# Altium PCB mach_relay_dao_chieu.PcbDoc
Units mil, origin at the board's own origin, x right, y up, seen from the top; angles counter-clockwise.
Board outline 4230 x 1740 mil, 2 copper layers (Top Layer, Bottom Layer); 21 components, 18 nets, 55 pads, 0 vias.
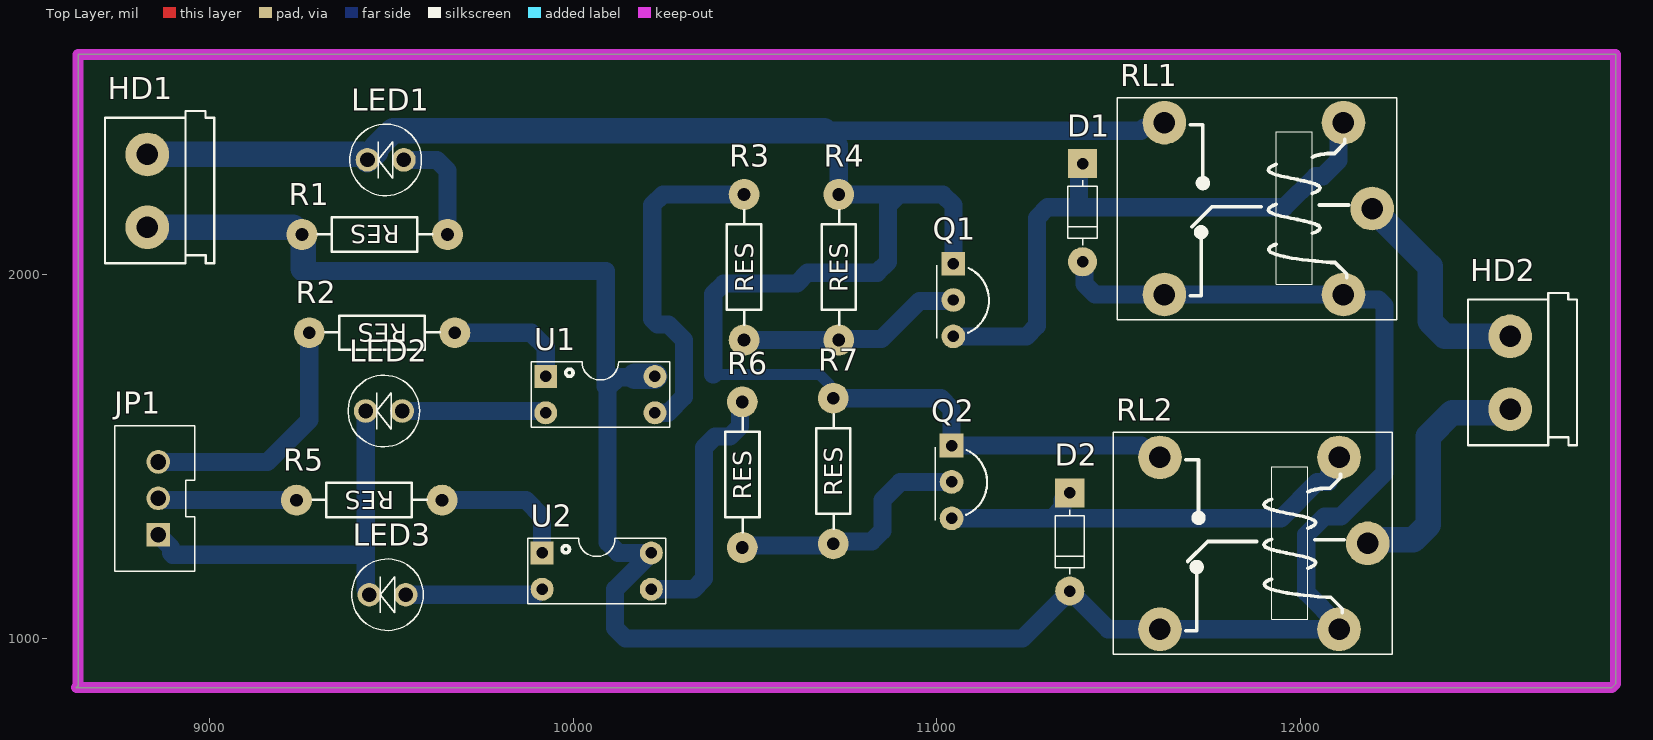
[diagram p0: Top Layer view]
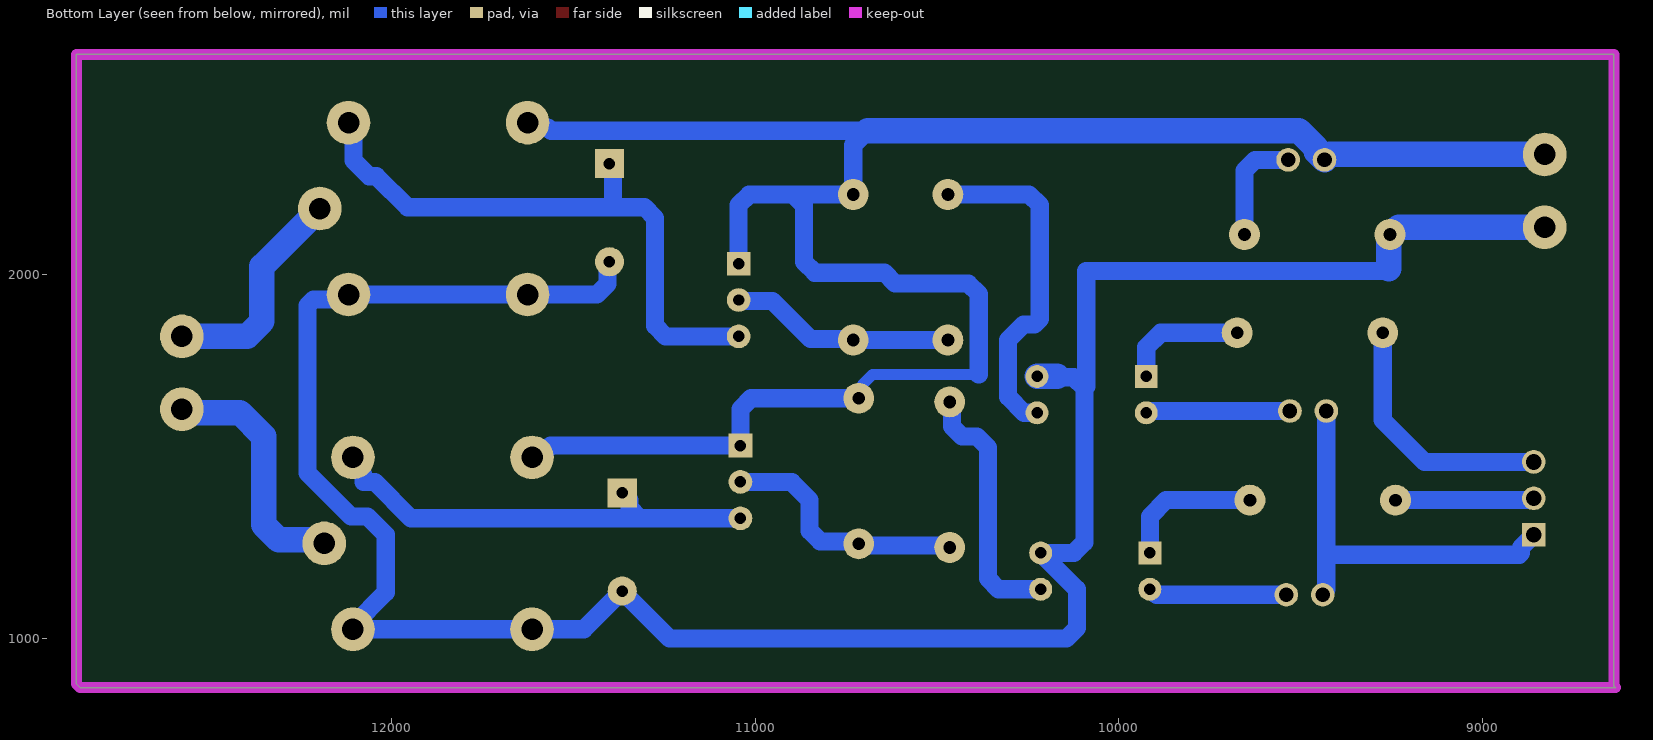
[diagram p1: Bottom Layer view, seen from below]

## Layer stack, top to bottom
Top Solder: solder mask 0.4, Solder Resist, Dk 3.5
Top Layer: signal copper 1.4
Dielectric 1: dielectric 12.6, FR-4, Dk 4.8
Bottom Layer: signal copper 1.4
Bottom Solder: solder mask 0.4, Solder Resist, Dk 3.5

## Board outline
8635,865 8640,870 8640,2605 12865,2605 12865,875 12855,865

## Design rules (kind name [scope] priority, off if disabled: settings)
Clearance [All] p1: gap=10 ignorepadtopadclearanceinfootprint=FALSE except(0: Arc-Hole Track-Hole SMDPad-Hole THPad-Hole Via-Hole Fill-Hole Poly-Hole Region-Hole Text-Hole)
PolygonConnect [All] p1: connectstyle=Relief reliefconductorwidth=10 reliefentries=4 polygonreliefangle="90 Angle" airgapwidth=10
RoutingVias [All] p1: holewidth=28 width=50 viastyle="Through Hole" minholewidth=28 minwidth=50 maxholewidth=28 maxwidth=50
SolderMaskExpansion [All] p1: expansion=4 istentingtop=FALSE
Width [All] p1: maxlimit=70 minlimit=10 preferedwidth=50 toplayer_maxwidth=10 toplayer_prefwidth=10 bottomlayer_minwidth=30 minimp=50.000000 maximp=50.000000 favimp=50.000000
30 further rules are at their usual default settings.

## Components (designator, comment, footprint, x,y, rotation, side; value= is the part's Value field where it differs from the comment)
D1 "1N4007" 1N4007 11400,2305 r270 top value=1N4148
D2 "1N4007" 1N4007 11365,1400 r270 top value=1N4148
HD1 "Header 2" KF301-2P 8830,2330 r270 top
HD2 "Header 2" KF301-2P 12575,1830 r270 top
JP1 "JP3" "XH 2.54-3P" 8860,1285 r90 top value="Connector 3"
LED1 "LED" LED-5MM-WHITE 9535,2315 r180 top value="LED 3 ly Single Colour"
LED2 "LED" LED-5MM-WHITE 9530,1625 r180 top value="LED 3 ly Single Colour"
LED3 "LED" LED-5MM-WHITE 9540,1120 r180 top value="LED 3 ly Single Colour"
Q1 "2N3904" TO-92 11045,1930 r270 top
Q2 "2N3904" TO-92 11040,1430 r270 top
R1 "1k" RES-1/4W 9440,2115 r180 top
R2 "220" RES-1/4W 9460,1845 r180 top
R3 "220" RES-1/4W 10475,2035 r90 top
R4 "10k" RES-1/4W 10735,2035 r90 top
R5 "220" RES-1/4W 9425,1385 r180 top
R6 "220" RES-1/4W 10470,1465 r90 top
R7 "10k" RES-1/4W 10720,1475 r90 top
RL1 "12v" SRD-05VDC-SL-C 12195.87,2181.22 r90 top value="Relay SPDT, 10A, 12V"
RL2 "12v" SRD-05VDC-SL-C 12183.74,1261.22 r90 top value="Relay SPDT, 10A, 12V"
U1 "PC817" PC817 9925,1710 r270 top
U2 "PC817" PC817 9915,1225 r270 top

## Footprints (in the part's own frame and the unit in brackets; to place one, negate y for a bottom-side part, rotate by r counter-clockwise, add the part's x,y. Pads: shape width x height; smd on the part's side, far side on the other; paste and mask are expansions set on the pad)
1N4007 [mil]
  rect 80x80 hole 31.5: 1(0,0)
  round 80 hole 31.5: 2(270,0)
  silkscreen extent 46,-40 224,40, body extent -22,-52 286,52, height 112
KF301-2P [mil]
  round 120 hole 59.06: 1(0,0) 2(200,0)
  silkscreen extent -119,-116 299,184, body extent -118,-116 299,184, height 399
LED-5MM-WHITE [mil]
  round 65 hole 40: 1(0,0) 2(100,0)
  silkscreen extent -48,-98 148,98, body extent -54,-105 155,105, height 370
PC817 [mm]
  rect 1.6x1.6 hole 0.8: 1(-0.254,0)
  round 1.6 hole 0.8: 2(2.286,0) 3(2.286,7.62) 4(-0.254,7.62)
  silkscreen extent -1.27,-1.02 3.3,8.64, body extent -1.28,0 3.31,7.88, height 4.3
RES-1/4W [mil]
  round 85 hole 35: 1(-215,5) 2(185,5)
  silkscreen extent -173,-42 141,52, body extent -227,-42 197,52, height 95
SRD-05VDC-SL-C [mm] "Relay 5V 10A 5 chan"
  round 3.048 hole 1.5: 1(0,0) 2(-6,14.5) 3(6,14.5) 4(6,2) 5(-6,2)
  silkscreen extent -7.75,-1.71 7.75,17.78, body extent -7.75,-1.41 7.65,17.79, height 15.02
TO-92 [mil] "TO-92"
  rect 65x65 hole 31.5: 1(-100,0)
  round 65 hole 31.5: 2(0,0) 3(100,0)
  silkscreen extent -95,-45 105,98, body extent -109,-66 109,95, height 285
"XH 2.54-3P" [mil]
  rect 65x65 hole 43.31: 1(0,0)
  round 65 hole 43.31: 2(100,0) 3(200,0)
  silkscreen extent -100,-100 300,120, body extent -95,-95 295,131, height 276

## Part data
D1 D2: "Diode 1N4007 1A 1000V"
HD1 HD2: "Header, 2-Pin", Manufacturer="Generic Components", Class=Connector
JP1: library part Con3, "Header duc 3, Connector 3, Header 3"
LED1 LED2 LED3: "LED Single"
Q1 Q2: "NPN Transistor 0.2A 40V", ComponentLink1Description="Manufacturer Link", ComponentLink1URL=http://www.fairchildsemi.com/, ComponentLink2Description=Datasheet, ComponentLink2URL=http://www.fairchildsemi.com/ds/2N%2F2N3904.pdf, DatasheetVersion=1997, LatestRevisionDate=15-Jan-2003, LatestRevisionNote="PCB Footprint 'BCY-W3/D4.7' replaced", PackageDescription="TO, Flat Index; 3 In-Line, Axial Leads; Body Dia. 4.5mm; Leads 0.51 x 0.48 mm (max)", PackageReference=TO-92A, PackageVersion=Sep-1998, Published=8-Jun-2000, Publisher="Altium Limited"
R1 R2 R3 R4 R5 R6 R7: library part Res1/4W, "Tro cam"
RL1 RL2: library part "Relay 1", "Relay SPDT,10A - 12VDC 5 Pin"
U1 U2: "Single Opto"

## Nets (pads, with @x,y where several pads share a name; then routed paths per layer and width w, separated by ;. In a path a pad name is that pad's centre, name@x,y a point inside that pad or via, vN(x,y) a via of type N, cw(c..) or ccw(c..) an arc to the next point about the centre after c; other vN are vias at no path point)
+12: D1.2 D2.2 HD1.2 R1.2 RL1.2 RL1.5 RL2.2 RL2.5 U1.4 U2.4 | length 6742.6
  Bottom Layer w50: 9257.87,2016.42 9264.29,2010 10090,2010 10090,1693.22 10095,1688.22 ; U1.4 10222.51,1717.51 10124.29,1717.51 10095,1688.22 ; D1.2 11405.74,2029.26 11405.74,1973.55 11434.29,1945 RL1.2 RL1.5 12130.52,1931.61 12213.39,1931.61 12230,1915 12230,1455 12110,1335 12065,1335 12015,1285 12015,1125.92 12105,1035.92 RL2.5 RL2.2 11612.63,1025.24 11469.76,1025.24 D2.2 11235,1000 10144.29,1000 10115,1029.29 10115,1135 U2.4 10124.29,1235 10095,1264.29 10095,1688.22
  Bottom Layer w70: HD1.2 9230.94,2130 9250.94,2110 R1.2 9257.87,2107.13 9257.87,2016.42 ; 10170,1720 U1.4
GND: HD1.1 LED1.2 Q1.1 Q2.1 R4.2 R7.2 RL1.3 RL2.3 | length 5861.5
  Bottom Layer w30: 10385,1725 10677.43,1725 10704.48,1697.95 10704.48,1670.52 R7.2
  Bottom Layer w50: 10385,1725 10385,1946.42 10414.29,1975.71 10615,1975.71 10644.29,2005 10835.71,2005 10865,2034.29 10865,2190 10895,2220 ; R7.2 11010.71,1660 11040,1630.71 Q2.1 11561.37,1530 11593.93,1497.44 RL2.3 ; Q1.1 11045,2190.71 11015.71,2220 10895,2220 ; RL1.3 11611.61,2404.05 11569.76,2404.05 11560.71,2395 10690.71,2395 10730,2355.71 R4.2 10895,2220
  Bottom Layer w70: HD1.1 9420,2330 LED1.2 9457.5,2337.5 9457.5,2347.1 9505.4,2395 10690.71,2395
NetD1_1: D1.1 Q1.3 RL1.4 | length 1666.1
  Bottom Layer w50: Q1.3 11245.71,1830 11275,1859.29 11275,2155.71 11304.29,2185 11390,2185 ; D1.1 11390,2295 11390,2185 ; RL1.4 12103.73,2404.05 12103.73,2313.73 12060,2270 12040,2270 11955,2185 11390,2185
NetD2_1: D2.1 Q2.3 RL2.4 | length 1247.1
  Bottom Layer w50: Q2.3 11315.71,1330 ; D2.1 11345,1380 11345,1359.29 11315.71,1330 ; RL2.4 12105,1478.5 12075.71,1449.21 12075.71,1430 12045,1430 11945,1330 11315.71,1330
NetHD2_1: HD2.1 RL1.1 | length 613.1
  Bottom Layer w70: RL1.1 12355,2022.09 12355,1871.01 12396.01,1830 HD2.1
NetHD2_2: HD2.2 RL2.1 | length 686.5
  Bottom Layer w70: RL2.1 12193.31,1270.79 12308.99,1270.79 12350,1311.79 12350,1555 12415.43,1620.43 12565.43,1620.43 HD2.2
NetJP1_1: JP1.1 LED2.2 LED3.2 | length 1110.7
  Bottom Layer w50: JP1.1 8895,1250 8895,1235 8900,1230 9430,1230 ; LED2.2 9430,1230 ; LED3.2 9440,1124.06 9430,1134.06 9430,1230
NetJP1_2: JP1.2 R5.2 | length 382.1
  Bottom Layer w50: JP1.2 8864.06,1385 8869.06,1380 R5.2
NetJP1_3: JP1.3 R2.2 | length 702.6
  Bottom Layer w50: JP1.3 9160,1485 9275,1600 R2.2
NetLED1_1: LED1.1 R1.1 | length 307.8
  Bottom Layer w50: LED1.1 9625.71,2315 9655,2285.71 R1.1
NetLED2_1: LED2.1 U1.2 | length 397.1
  Bottom Layer w50: LED2.1 9916.48,1625 9921.48,1620 U1.2
NetLED3_1: LED3.1 U2.2 | length 381.2
  Bottom Layer w50: LED3.1 9896.48,1120 9911.48,1135 U2.2
NetQ1_2: Q1.2 R3.1 R4.1 | length 620.6
  Bottom Layer w50: R3.1 R4.1 10732.5,1822.5 10847.5,1822.5 10952.13,1927.13 11042.13,1927.13 Q1.2
NetQ2_2: Q2.2 R6.1 R7.1 | length 699.2
  Bottom Layer w50: R6.1 10470,1255 10710,1255 R7.1 10721.7,1266.7 10820.71,1266.7 10850,1295.99 10850,1380.71 10899.29,1430 Q2.2
NetR2_1: R2.1 U1.1 | length 346.6
  Bottom Layer w50: R2.1 9885,1840 9925,1800 U1.1
NetR3_2: R3.2 U1.3 | length 944.2
  Bottom Layer w50: U1.3@10225,1621.01 U1.3 10260.71,1620 10305,1664.29 10305,1820 10262.5,1862.5 10232.5,1862.5 10217.5,1877.5 10217.5,2190.71 10246.79,2220 R3.2
NetR5_1: R5.1 U2.1 | length 393.6
  Bottom Layer w50: R5.1 9870,1380 9915,1335 U2.1
NetR6_2: R6.2 U2.3 | length 710.2
  Bottom Layer w50: U2.3 10330.71,1135 10360,1164.29 10360,1525 10390,1555 10430.71,1555 10458.3,1582.59 10458.3,1643.3 R6.2

## Keep-outs
Keep-Out Layer:
  the board outline again, w30

## Text inside footprints (layer, text, board x,y; h text height)
R1: Top Overlay "RES" at 9524,2135 h50 r180
R2: Top Overlay "RES" at 9544,1865 h50 r180
R3: Top Overlay "RES" at 10495,1951 h50 r90
R4: Top Overlay "RES" at 10755,1951 h50 r90
R5: Top Overlay "RES" at 9509,1405 h50 r180
R6: Top Overlay "RES" at 10490,1381 h50 r90
R7: Top Overlay "RES" at 10740,1391 h50 r90